# EAGLE board LEDONLYCIRCLE (EAGLE 6.5.0)
CIRCULAR-LAYOUT-SETTINGS: 0.000000 0.000000 1.120000 0.000000 0 1

No outline drawn. Coordinates in mm, seen from the top.
Copper layers (1*16): Top 0.0356mm / dielectric 1.5011mm / Bottom 0.0356mm
Design rules "LaenPCBOrder *": minimum track width 8mil, minimum drill 15mil, track to track 6mil, track to pad 6mil, pad to pad 6mil, via to via 6mil, smd to smd 6mil, copper to edge 15mil, drill to drill 6mil, minimum pad ring 7mil, minimum via ring 7mil, stop-mask expansion 3mil, vias tented up to drill 0mil, thermal gap 10mil

## Footprints (pad centres in the part's own frame; a part is rotated, then mirrored left to right if it is on the bottom)
WS2812B = smd 1.5 x 0.9: 1-VDD 2.45,-1.65; 2-DOUT 2.45,1.65; 3-GND -2.45,1.65; 4-DIN -2.45,-1.65

## Placement (x,y rotation side)
LED1  WS2812B5050  [WS2812B]  0,28.45 0 top
LED2  WS2812B5050  [WS2812B]  7.36,27.48 345 top
LED3  WS2812B5050  [WS2812B]  14.22,24.64 330 top
LED4  WS2812B5050  [WS2812B]  20.12,20.12 315 top
LED5  WS2812B5050  [WS2812B]  24.64,14.22 300 top
LED6  WS2812B5050  [WS2812B]  27.48,7.36 285 top
LED7  WS2812B5050  [WS2812B]  28.45,0 270 top
LED8  WS2812B5050  [WS2812B]  27.48,-7.36 255 top
LED9  WS2812B5050  [WS2812B]  24.64,-14.22 240 top
LED10  WS2812B5050  [WS2812B]  20.12,-20.12 225 top
LED11  WS2812B5050  [WS2812B]  14.22,-24.64 210 top
LED12  WS2812B5050  [WS2812B]  7.36,-27.48 195 top
LED13  WS2812B5050  [WS2812B]  0,-28.45 180 top
LED14  WS2812B5050  [WS2812B]  -7.36,-27.48 165 top
LED15  WS2812B5050  [WS2812B]  -14.22,-24.64 150 top
LED16  WS2812B5050  [WS2812B]  -20.12,-20.12 135 top
LED17  WS2812B5050  [WS2812B]  -24.64,-14.22 120 top
LED18  WS2812B5050  [WS2812B]  -27.48,-7.36 105 top
LED19  WS2812B5050  [WS2812B]  -28.45,0 90 top
LED20  WS2812B5050  [WS2812B]  -27.48,7.36 75 top
LED21  WS2812B5050  [WS2812B]  -24.64,14.22 60 top
LED22  WS2812B5050  [WS2812B]  -20.12,20.12 45 top
LED23  WS2812B5050  [WS2812B]  -14.22,24.64 30 top
LED24  WS2812B5050  [WS2812B]  -7.36,27.48 15 top

## Library data of the parts
LED1-LED24 = microbuilder

## Nets
+5V: LED2.1-VDD LED3.1-VDD LED4.1-VDD LED5.1-VDD LED6.1-VDD LED7.1-VDD LED8.1-VDD LED9.1-VDD LED10.1-VDD LED11.1-VDD LED12.1-VDD
GND: LED1.3-GND LED2.3-GND LED3.3-GND LED4.3-GND LED5.3-GND LED6.3-GND LED7.3-GND LED8.3-GND LED9.3-GND LED10.3-GND LED24.3-GND
N$3: LED1.2-DOUT LED2.4-DIN
N$4: LED2.2-DOUT LED3.4-DIN
N$5: LED3.2-DOUT LED4.4-DIN
N$6: LED4.2-DOUT LED5.4-DIN
N$7: LED5.2-DOUT LED6.4-DIN
N$8: LED6.2-DOUT LED7.4-DIN
N$9: LED7.2-DOUT LED8.4-DIN
N$10: LED8.2-DOUT LED9.4-DIN
N$11: LED9.2-DOUT LED10.4-DIN
N$12: LED10.2-DOUT LED11.4-DIN
N$13: LED11.2-DOUT LED12.4-DIN
N$14: LED12.2-DOUT LED13.4-DIN
N$15: LED13.2-DOUT LED14.4-DIN
N$16: LED14.2-DOUT LED15.4-DIN
N$17: LED15.2-DOUT LED16.4-DIN
N$18: LED16.2-DOUT LED17.4-DIN
N$19: LED17.2-DOUT LED18.4-DIN
N$20: LED18.2-DOUT LED19.4-DIN
N$21: LED19.2-DOUT LED20.4-DIN
N$22: LED20.2-DOUT LED21.4-DIN
N$23: LED21.2-DOUT LED22.4-DIN
N$24: LED22.2-DOUT LED23.4-DIN
N$25: LED23.2-DOUT LED24.4-DIN
N$42: LED1.4-DIN
S$4: LED22.1-VDD
S$6: LED18.3-GND LED19.3-GND LED20.3-GND
S$7: LED21.3-GND
S$8: LED17.3-GND
S$10: LED16.1-VDD
S$11: LED17.1-VDD LED18.1-VDD LED19.1-VDD LED20.1-VDD LED21.1-VDD LED23.1-VDD
S$20: LED16.3-GND
S$32: LED24.1-VDD
S$40: LED11.3-GND LED12.3-GND LED13.3-GND LED14.3-GND
S$41: LED13.1-VDD
S$42: LED14.1-VDD
S$44: LED15.3-GND
S$46: LED15.1-VDD
S$48: LED22.3-GND LED23.3-GND
S$49: LED1.1-VDD

## Tracks (layer width: path | path; a pad name or v marks a point on that pad's centre or on a via)
+5V  (10 unrouted)
GND  (10 unrouted)
N$3  (1 unrouted)
N$4  (1 unrouted)
N$5  (1 unrouted)
N$6  (1 unrouted)
N$7  (1 unrouted)
N$8  (1 unrouted)
N$9  (1 unrouted)
N$10  (1 unrouted)
N$11  (1 unrouted)
N$12  (1 unrouted)
N$13  (1 unrouted)
N$14  (1 unrouted)
N$15  (1 unrouted)
N$16  (1 unrouted)
N$17  (1 unrouted)
N$18  (1 unrouted)
N$19  (1 unrouted)
N$20  (1 unrouted)
N$21  (1 unrouted)
N$22  (1 unrouted)
N$23  (1 unrouted)
N$24  (1 unrouted)
N$25  (1 unrouted)
S$6  (2 unrouted)
S$11  (5 unrouted)
S$40  (3 unrouted)
S$48  (1 unrouted)
(copper drawn outside any net)
  shapes: Bottom area x4091, Top area x4091